# EAGLE board Qwiic Flex Glove Controller_Panel-v10 (EAGLE 7.7.0), part 1 of 4
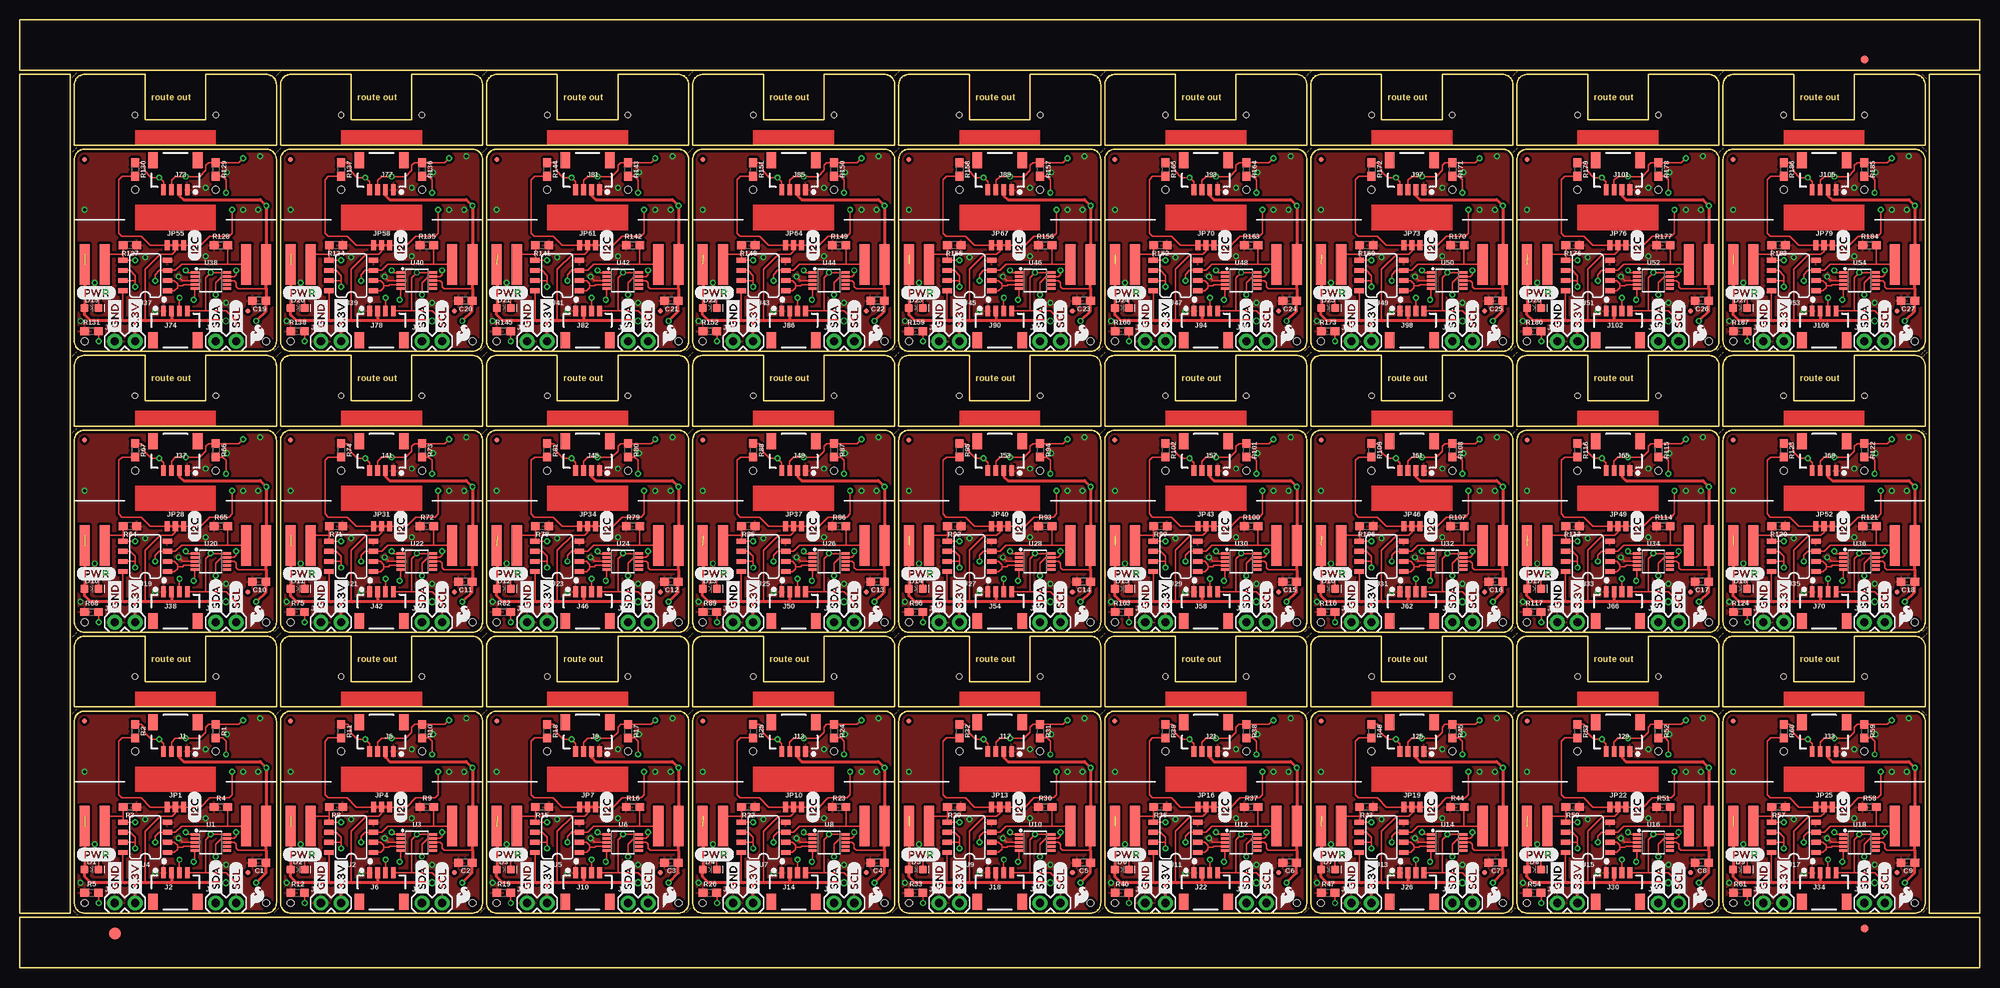
[diagram p0: board, top side]
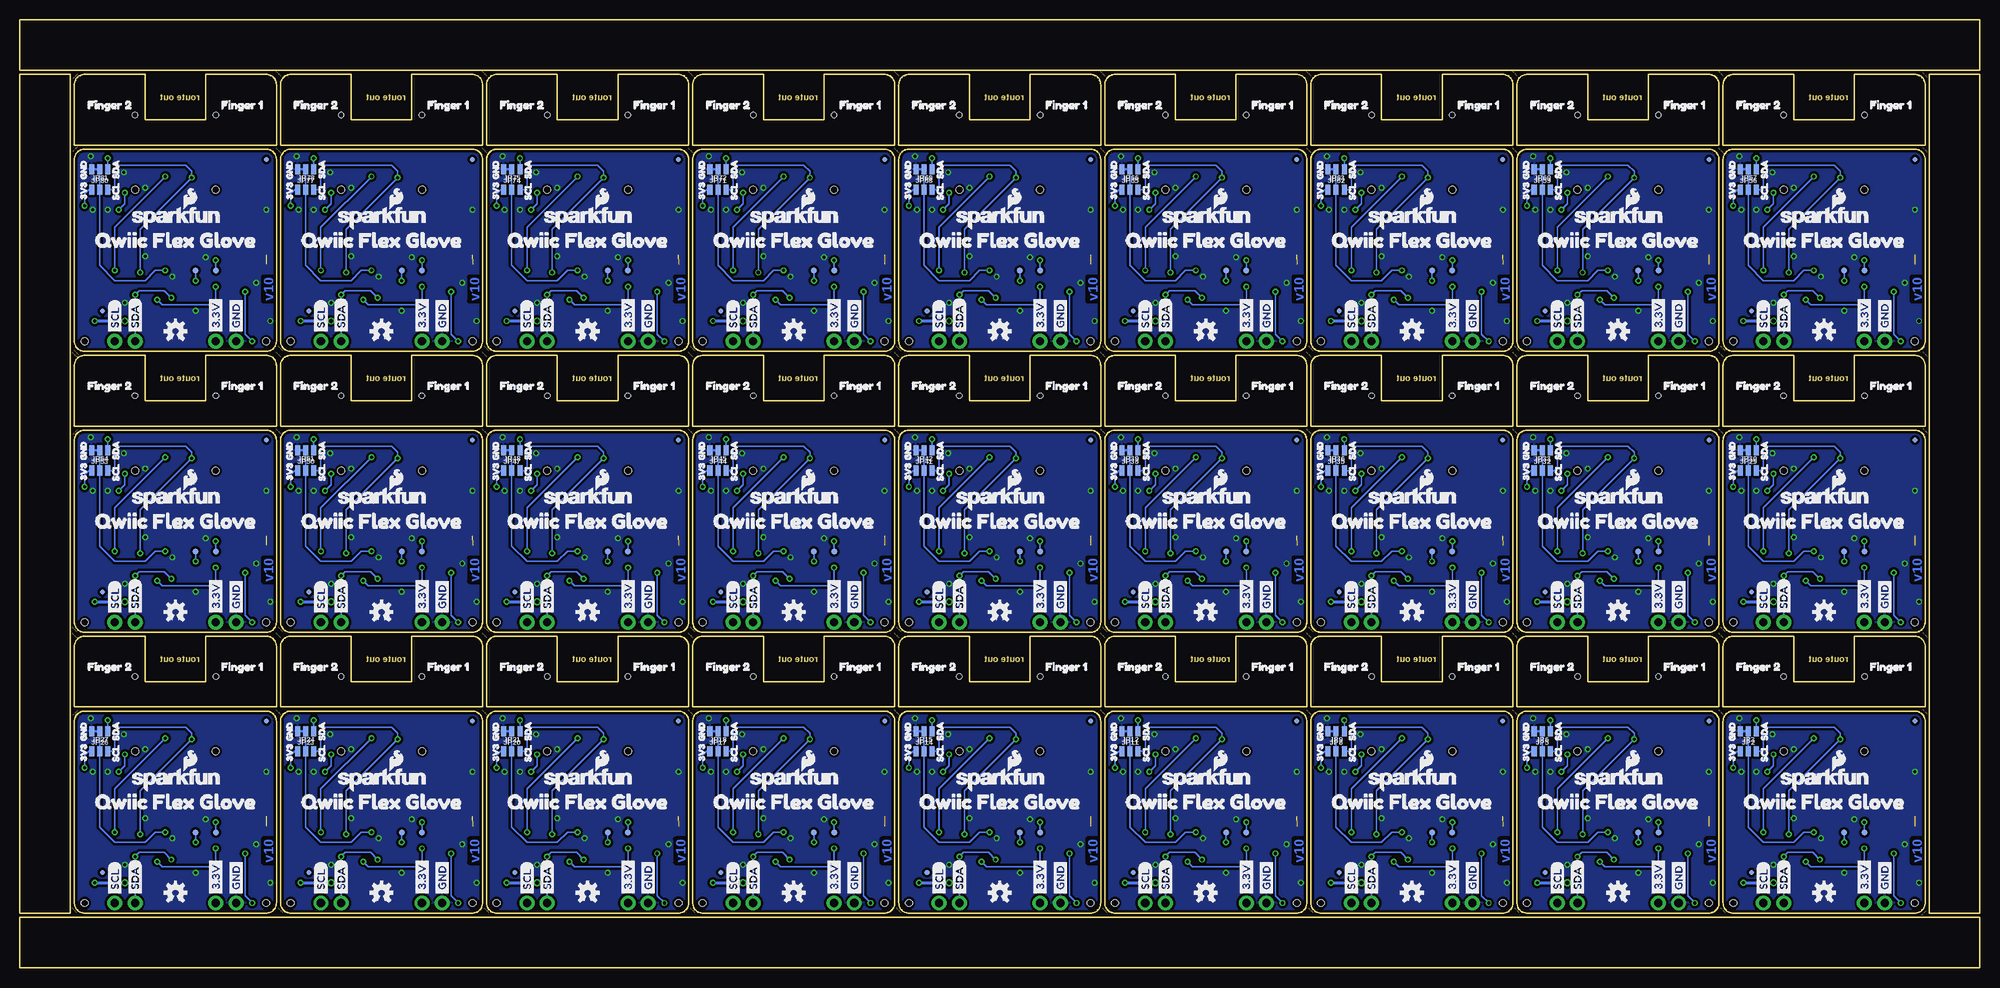
[diagram p1: board, bottom side, seen from below]

Size 246.38 x 119.13 mm. Coordinates in mm from the lower left corner, seen from the top.
Outline: 510 segments
Copper layers (1*16): Top 0.035mm / dielectric 1.5mm / Bottom 0.035mm
Design rules "SparkFun-2-layer-TIGHT": minimum track width 7mil, minimum drill 15mil, track to track 7mil, track to pad 7mil, pad to pad 7mil, via to via 7mil, smd to smd 7mil, copper to edge 7mil, drill to drill 7mil, minimum pad ring 7mil, minimum via ring 7mil, stop-mask expansion 4mil, vias tented up to drill 25mil, thermal gap 10mil
Holes 0.9 mm at 14.48,27.18 24.64,27.18 8.13,8.13 30.99,8.13 40.39,27.18 50.55,27.18 34.04,8.13 56.9,8.13 66.29,27.18 76.45,27.18 59.94,8.13 82.8,8.13 92.2,27.18 102.36,27.18 85.85,8.13 108.71,8.13 118.11,27.18 128.27,27.18 111.76,8.13 134.62,8.13 144.02,27.18 154.18,27.18 137.67,8.13 160.53,8.13 169.93,27.18 180.09,27.18 163.58,8.13 186.44,8.13 195.83,27.18 205.99,27.18 189.48,8.13 212.34,8.13 221.74,27.18 231.9,27.18 215.39,8.13 238.25,8.13 14.48,62.48 24.64,62.48 8.13,43.43 30.99,43.43 40.39,62.48 50.55,62.48 34.04,43.43 56.9,43.43 66.29,62.48 76.45,62.48 59.94,43.43 82.8,43.43 92.2,62.48 102.36,62.48 85.85,43.43 108.71,43.43 118.11,62.48 128.27,62.48 111.76,43.43 134.62,43.43 144.02,62.48 154.18,62.48 137.67,43.43 160.53,43.43 169.93,62.48 180.09,62.48 163.58,43.43 186.44,43.43 195.83,62.48 205.99,62.48 189.48,43.43 212.34,43.43 221.74,62.48 231.9,62.48 215.39,43.43 238.25,43.43 14.48,97.79 24.64,97.79 8.13,78.74 30.99,78.74 40.39,97.79 50.55,97.79 34.04,78.74 56.9,78.74 66.29,97.79 76.45,97.79 59.94,78.74 82.8,78.74 92.2,97.79 102.36,97.79 85.85,78.74 108.71,78.74 118.11,97.79 128.27,97.79 111.76,78.74 134.62,78.74 144.02,97.79 154.18,97.79 137.67,78.74 160.53,78.74 169.93,97.79 180.09,97.79 163.58,78.74 186.44,78.74 195.83,97.79 205.99,97.79 189.48,78.74 212.34,78.74 221.74,97.79 231.9,97.79 215.39,78.74 238.25,78.74
Holes 0.7 mm at 24.64,36.58 14.48,36.58 50.55,36.58 40.39,36.58 76.45,36.58 66.29,36.58 102.36,36.58 92.2,36.58 128.27,36.58 118.11,36.58 154.18,36.58 144.02,36.58 180.09,36.58 169.93,36.58 205.99,36.58 195.83,36.58 231.9,36.58 221.74,36.58 24.64,71.88 14.48,71.88 50.55,71.88 40.39,71.88 76.45,71.88 66.29,71.88 102.36,71.88 92.2,71.88 128.27,71.88 118.11,71.88 154.18,71.88 144.02,71.88 180.09,71.88 169.93,71.88 205.99,71.88 195.83,71.88 231.9,71.88 221.74,71.88 24.64,107.19 14.48,107.19 50.55,107.19 40.39,107.19 76.45,107.19 66.29,107.19 102.36,107.19 92.2,107.19 128.27,107.19 118.11,107.19 154.18,107.19 144.02,107.19 180.09,107.19 169.93,107.19 205.99,107.19 195.83,107.19 231.9,107.19 221.74,107.19

## Footprints (pad centres in the part's own frame; a part is rotated, then mirrored left to right if it is on the bottom)
0603 = smd 1.1 x 1: 1 -0.85,0; 2 0.85,0
LED-0603 = smd 1 x 1: A -0.877,0; C 0.877,0
FIDUCIAL-1.5X3 = smd 1.5 x 1.5: 1 0,0
FIDUCIAL-1X2 = smd 1 x 1: 1 0,0
FIDUCIAL-MICRO = smd 0.635 x 0.635: 1 0,0
1X04_1MM_RA = smd 0.6 x 1.35: 1 -1.5,0; 2 -0.5,0; 3 0.5,0; 4 1.5,0 | smd 1.2 x 2: NC1 2.8,-3.675; NC2 -2.8,-3.675
1X02 = drill 1.016 pad 1.88: 1 0,0; 2 2.54,0
SMT-JUMPER_3_2-NC_TRACE_NO-SILK = smd 0.635 x 1.27: 1 -1.016,0; 2 0,0; 3 1.016,0
SMT-JUMPER_3_1-NC_TRACE_NO-SILK = smd 0.635 x 1.27: 1 -1.016,0; 2 0,0; 3 1.016,0
SMT-JUMPER_3_0-NO_TRACE_NO-SILK = smd 0.635 x 1.27: 1 -1.016,0; 2 0,0; 3 1.016,0
FLEX_SENSOR = smd 1.27 x 5.08: P$1 -1.27,-1.27; P$2 1.27,-1.27
PAD.03X.03 = smd 0.762 x 0.762: P$1 0,0
MSOP10 = smd 0.3 x 1: 1 -1,-2.05; 2 -0.5,-2.05; 3 0,-2.05; 4 0.5,-2.05; 5 1,-2.05; 6 1,2.05; 7 0.5,2.05; 8 0,2.05; 9 -0.5,2.05; 10 -1,2.05
SO08 = smd 0.6 x 1.2: 1 -1.905,-2.8; 2 -0.635,-2.8; 3 0.635,-2.8; 4 1.905,-2.8; 5 1.905,2.8; 6 0.635,2.8; 7 -0.635,2.8; 8 -1.905,2.8

## Placement (x,y rotation side)
C1  0.1uF  [0603]  30.1,13.21 180 top
C2  0.1uF  [0603]  56.01,13.21 180 top
C3  0.1uF  [0603]  81.92,13.21 180 top
C4  0.1uF  [0603]  107.82,13.21 180 top
C5  0.1uF  [0603]  133.73,13.21 180 top
C6  0.1uF  [0603]  159.64,13.21 180 top
C7  0.1uF  [0603]  185.55,13.21 180 top
C8  0.1uF  [0603]  211.46,13.21 180 top
C9  0.1uF  [0603]  237.36,13.21 180 top
C10  0.1uF  [0603]  30.1,48.51 180 top
C11  0.1uF  [0603]  56.01,48.51 180 top
C12  0.1uF  [0603]  81.92,48.51 180 top
C13  0.1uF  [0603]  107.82,48.51 180 top
C14  0.1uF  [0603]  133.73,48.51 180 top
C15  0.1uF  [0603]  159.64,48.51 180 top
C16  0.1uF  [0603]  185.55,48.51 180 top
C17  0.1uF  [0603]  211.46,48.51 180 top
C18  0.1uF  [0603]  237.36,48.51 180 top
C19  0.1uF  [0603]  30.1,83.82 180 top
C20  0.1uF  [0603]  56.01,83.82 180 top
C21  0.1uF  [0603]  81.92,83.82 180 top
C22  0.1uF  [0603]  107.82,83.82 180 top
C23  0.1uF  [0603]  133.73,83.82 180 top
C24  0.1uF  [0603]  159.64,83.82 180 top
C25  0.1uF  [0603]  185.55,83.82 180 top
C26  0.1uF  [0603]  211.46,83.82 180 top
C27  0.1uF  [0603]  237.36,83.82 180 top
D1  RED  [LED-0603]  9.02,12.32 0 top
D2  RED  [LED-0603]  34.92,12.32 0 top
D3  RED  [LED-0603]  60.83,12.32 0 top
D4  RED  [LED-0603]  86.74,12.32 0 top
D5  RED  [LED-0603]  112.65,12.32 0 top
D6  RED  [LED-0603]  138.56,12.32 0 top
D7  RED  [LED-0603]  164.47,12.32 0 top
D8  RED  [LED-0603]  190.37,12.32 0 top
D9  RED  [LED-0603]  216.28,12.32 0 top
D10  RED  [LED-0603]  9.02,47.62 0 top
D11  RED  [LED-0603]  34.92,47.62 0 top
D12  RED  [LED-0603]  60.83,47.62 0 top
D13  RED  [LED-0603]  86.74,47.62 0 top
D14  RED  [LED-0603]  112.65,47.62 0 top
D15  RED  [LED-0603]  138.56,47.62 0 top
D16  RED  [LED-0603]  164.47,47.62 0 top
D17  RED  [LED-0603]  190.37,47.62 0 top
D18  RED  [LED-0603]  216.28,47.62 0 top
D19  RED  [LED-0603]  9.02,82.93 0 top
D20  RED  [LED-0603]  34.92,82.93 0 top
D21  RED  [LED-0603]  60.83,82.93 0 top
D22  RED  [LED-0603]  86.74,82.93 0 top
D23  RED  [LED-0603]  112.65,82.93 0 top
D24  RED  [LED-0603]  138.56,82.93 0 top
D25  RED  [LED-0603]  164.47,82.93 0 top
D26  RED  [LED-0603]  190.37,82.93 0 top
D27  RED  [LED-0603]  216.28,82.93 0 top
E$1  [FIDUCIAL-1.5X3]  11.94,4.32 0 top
E$5  [FIDUCIAL-1X2]  231.9,114.17 270 top
E$6  [FIDUCIAL-1X2]  231.9,4.95 90 top
FD1  FIDUCIALUFIDUCIAL  [FIDUCIAL-MICRO]  28.7,11.94 0 top
FD2  FIDUCIALUFIDUCIAL  [FIDUCIAL-MICRO]  28.7,11.94 0 bottom
FD3  FIDUCIALUFIDUCIAL  [FIDUCIAL-MICRO]  8.13,30.99 0 top
FD4  FIDUCIALUFIDUCIAL  [FIDUCIAL-MICRO]  8.13,30.99 0 bottom
FD5  FIDUCIALUFIDUCIAL  [FIDUCIAL-MICRO]  54.61,11.94 0 top
FD6  FIDUCIALUFIDUCIAL  [FIDUCIAL-MICRO]  54.61,11.94 0 bottom
FD7  FIDUCIALUFIDUCIAL  [FIDUCIAL-MICRO]  34.04,30.99 0 top
FD8  FIDUCIALUFIDUCIAL  [FIDUCIAL-MICRO]  34.04,30.99 0 bottom
FD9  FIDUCIALUFIDUCIAL  [FIDUCIAL-MICRO]  80.52,11.94 0 top
FD10  FIDUCIALUFIDUCIAL  [FIDUCIAL-MICRO]  80.52,11.94 0 bottom
FD11  FIDUCIALUFIDUCIAL  [FIDUCIAL-MICRO]  59.94,30.99 0 top
FD12  FIDUCIALUFIDUCIAL  [FIDUCIAL-MICRO]  59.94,30.99 0 bottom
FD13  FIDUCIALUFIDUCIAL  [FIDUCIAL-MICRO]  106.43,11.94 0 top
FD14  FIDUCIALUFIDUCIAL  [FIDUCIAL-MICRO]  106.43,11.94 0 bottom
FD15  FIDUCIALUFIDUCIAL  [FIDUCIAL-MICRO]  85.85,30.99 0 top
FD16  FIDUCIALUFIDUCIAL  [FIDUCIAL-MICRO]  85.85,30.99 0 bottom
FD17  FIDUCIALUFIDUCIAL  [FIDUCIAL-MICRO]  132.33,11.94 0 top
FD18  FIDUCIALUFIDUCIAL  [FIDUCIAL-MICRO]  132.33,11.94 0 bottom
FD19  FIDUCIALUFIDUCIAL  [FIDUCIAL-MICRO]  111.76,30.99 0 top
FD20  FIDUCIALUFIDUCIAL  [FIDUCIAL-MICRO]  111.76,30.99 0 bottom
FD21  FIDUCIALUFIDUCIAL  [FIDUCIAL-MICRO]  158.24,11.94 0 top
FD22  FIDUCIALUFIDUCIAL  [FIDUCIAL-MICRO]  158.24,11.94 0 bottom
FD23  FIDUCIALUFIDUCIAL  [FIDUCIAL-MICRO]  137.67,30.99 0 top
FD24  FIDUCIALUFIDUCIAL  [FIDUCIAL-MICRO]  137.67,30.99 0 bottom
FD25  FIDUCIALUFIDUCIAL  [FIDUCIAL-MICRO]  184.15,11.94 0 top
FD26  FIDUCIALUFIDUCIAL  [FIDUCIAL-MICRO]  184.15,11.94 0 bottom
FD27  FIDUCIALUFIDUCIAL  [FIDUCIAL-MICRO]  163.58,30.99 0 top
FD28  FIDUCIALUFIDUCIAL  [FIDUCIAL-MICRO]  163.58,30.99 0 bottom
FD29  FIDUCIALUFIDUCIAL  [FIDUCIAL-MICRO]  210.06,11.94 0 top
FD30  FIDUCIALUFIDUCIAL  [FIDUCIAL-MICRO]  210.06,11.94 0 bottom
FD31  FIDUCIALUFIDUCIAL  [FIDUCIAL-MICRO]  189.48,30.99 0 top
FD32  FIDUCIALUFIDUCIAL  [FIDUCIAL-MICRO]  189.48,30.99 0 bottom
FD33  FIDUCIALUFIDUCIAL  [FIDUCIAL-MICRO]  235.97,11.94 0 top
FD34  FIDUCIALUFIDUCIAL  [FIDUCIAL-MICRO]  235.97,11.94 0 bottom
FD35  FIDUCIALUFIDUCIAL  [FIDUCIAL-MICRO]  215.39,30.99 0 top
FD36  FIDUCIALUFIDUCIAL  [FIDUCIAL-MICRO]  215.39,30.99 0 bottom
FD37  FIDUCIALUFIDUCIAL  [FIDUCIAL-MICRO]  28.7,47.24 0 top
FD38  FIDUCIALUFIDUCIAL  [FIDUCIAL-MICRO]  28.7,47.24 0 bottom
FD39  FIDUCIALUFIDUCIAL  [FIDUCIAL-MICRO]  8.13,66.29 0 top
FD40  FIDUCIALUFIDUCIAL  [FIDUCIAL-MICRO]  8.13,66.29 0 bottom
FD41  FIDUCIALUFIDUCIAL  [FIDUCIAL-MICRO]  54.61,47.24 0 top
FD42  FIDUCIALUFIDUCIAL  [FIDUCIAL-MICRO]  54.61,47.24 0 bottom
FD43  FIDUCIALUFIDUCIAL  [FIDUCIAL-MICRO]  34.04,66.29 0 top
FD44  FIDUCIALUFIDUCIAL  [FIDUCIAL-MICRO]  34.04,66.29 0 bottom
FD45  FIDUCIALUFIDUCIAL  [FIDUCIAL-MICRO]  80.52,47.24 0 top
FD46  FIDUCIALUFIDUCIAL  [FIDUCIAL-MICRO]  80.52,47.24 0 bottom
FD47  FIDUCIALUFIDUCIAL  [FIDUCIAL-MICRO]  59.94,66.29 0 top
FD48  FIDUCIALUFIDUCIAL  [FIDUCIAL-MICRO]  59.94,66.29 0 bottom
FD49  FIDUCIALUFIDUCIAL  [FIDUCIAL-MICRO]  106.43,47.24 0 top
FD50  FIDUCIALUFIDUCIAL  [FIDUCIAL-MICRO]  106.43,47.24 0 bottom
FD51  FIDUCIALUFIDUCIAL  [FIDUCIAL-MICRO]  85.85,66.29 0 top
FD52  FIDUCIALUFIDUCIAL  [FIDUCIAL-MICRO]  85.85,66.29 0 bottom
FD53  FIDUCIALUFIDUCIAL  [FIDUCIAL-MICRO]  132.33,47.24 0 top
FD54  FIDUCIALUFIDUCIAL  [FIDUCIAL-MICRO]  132.33,47.24 0 bottom
FD55  FIDUCIALUFIDUCIAL  [FIDUCIAL-MICRO]  111.76,66.29 0 top
FD56  FIDUCIALUFIDUCIAL  [FIDUCIAL-MICRO]  111.76,66.29 0 bottom
FD57  FIDUCIALUFIDUCIAL  [FIDUCIAL-MICRO]  158.24,47.24 0 top
FD58  FIDUCIALUFIDUCIAL  [FIDUCIAL-MICRO]  158.24,47.24 0 bottom
FD59  FIDUCIALUFIDUCIAL  [FIDUCIAL-MICRO]  137.67,66.29 0 top
FD60  FIDUCIALUFIDUCIAL  [FIDUCIAL-MICRO]  137.67,66.29 0 bottom
FD61  FIDUCIALUFIDUCIAL  [FIDUCIAL-MICRO]  184.15,47.24 0 top
FD62  FIDUCIALUFIDUCIAL  [FIDUCIAL-MICRO]  184.15,47.24 0 bottom
FD63  FIDUCIALUFIDUCIAL  [FIDUCIAL-MICRO]  163.58,66.29 0 top
FD64  FIDUCIALUFIDUCIAL  [FIDUCIAL-MICRO]  163.58,66.29 0 bottom
FD65  FIDUCIALUFIDUCIAL  [FIDUCIAL-MICRO]  210.06,47.24 0 top
FD66  FIDUCIALUFIDUCIAL  [FIDUCIAL-MICRO]  210.06,47.24 0 bottom
FD67  FIDUCIALUFIDUCIAL  [FIDUCIAL-MICRO]  189.48,66.29 0 top
FD68  FIDUCIALUFIDUCIAL  [FIDUCIAL-MICRO]  189.48,66.29 0 bottom
FD69  FIDUCIALUFIDUCIAL  [FIDUCIAL-MICRO]  235.97,47.24 0 top
FD70  FIDUCIALUFIDUCIAL  [FIDUCIAL-MICRO]  235.97,47.24 0 bottom
FD71  FIDUCIALUFIDUCIAL  [FIDUCIAL-MICRO]  215.39,66.29 0 top
FD72  FIDUCIALUFIDUCIAL  [FIDUCIAL-MICRO]  215.39,66.29 0 bottom
FD73  FIDUCIALUFIDUCIAL  [FIDUCIAL-MICRO]  28.7,82.55 0 top
FD74  FIDUCIALUFIDUCIAL  [FIDUCIAL-MICRO]  28.7,82.55 0 bottom
FD75  FIDUCIALUFIDUCIAL  [FIDUCIAL-MICRO]  8.13,101.6 0 top
FD76  FIDUCIALUFIDUCIAL  [FIDUCIAL-MICRO]  8.13,101.6 0 bottom
FD77  FIDUCIALUFIDUCIAL  [FIDUCIAL-MICRO]  54.61,82.55 0 top
FD78  FIDUCIALUFIDUCIAL  [FIDUCIAL-MICRO]  54.61,82.55 0 bottom
FD79  FIDUCIALUFIDUCIAL  [FIDUCIAL-MICRO]  34.04,101.6 0 top
FD80  FIDUCIALUFIDUCIAL  [FIDUCIAL-MICRO]  34.04,101.6 0 bottom
FD81  FIDUCIALUFIDUCIAL  [FIDUCIAL-MICRO]  80.52,82.55 0 top
FD82  FIDUCIALUFIDUCIAL  [FIDUCIAL-MICRO]  80.52,82.55 0 bottom
FD83  FIDUCIALUFIDUCIAL  [FIDUCIAL-MICRO]  59.94,101.6 0 top
FD84  FIDUCIALUFIDUCIAL  [FIDUCIAL-MICRO]  59.94,101.6 0 bottom
FD85  FIDUCIALUFIDUCIAL  [FIDUCIAL-MICRO]  106.43,82.55 0 top
FD86  FIDUCIALUFIDUCIAL  [FIDUCIAL-MICRO]  106.43,82.55 0 bottom
FD87  FIDUCIALUFIDUCIAL  [FIDUCIAL-MICRO]  85.85,101.6 0 top
FD88  FIDUCIALUFIDUCIAL  [FIDUCIAL-MICRO]  85.85,101.6 0 bottom
FD89  FIDUCIALUFIDUCIAL  [FIDUCIAL-MICRO]  132.33,82.55 0 top
FD90  FIDUCIALUFIDUCIAL  [FIDUCIAL-MICRO]  132.33,82.55 0 bottom
FD91  FIDUCIALUFIDUCIAL  [FIDUCIAL-MICRO]  111.76,101.6 0 top
FD92  FIDUCIALUFIDUCIAL  [FIDUCIAL-MICRO]  111.76,101.6 0 bottom
FD93  FIDUCIALUFIDUCIAL  [FIDUCIAL-MICRO]  158.24,82.55 0 top
FD94  FIDUCIALUFIDUCIAL  [FIDUCIAL-MICRO]  158.24,82.55 0 bottom
FD95  FIDUCIALUFIDUCIAL  [FIDUCIAL-MICRO]  137.67,101.6 0 top
FD96  FIDUCIALUFIDUCIAL  [FIDUCIAL-MICRO]  137.67,101.6 0 bottom
FD97  FIDUCIALUFIDUCIAL  [FIDUCIAL-MICRO]  184.15,82.55 0 top
FD98  FIDUCIALUFIDUCIAL  [FIDUCIAL-MICRO]  184.15,82.55 0 bottom
FD99  FIDUCIALUFIDUCIAL  [FIDUCIAL-MICRO]  163.58,101.6 0 top
FD100  FIDUCIALUFIDUCIAL  [FIDUCIAL-MICRO]  163.58,101.6 0 bottom
FD101  FIDUCIALUFIDUCIAL  [FIDUCIAL-MICRO]  210.06,82.55 0 top
FD102  FIDUCIALUFIDUCIAL  [FIDUCIAL-MICRO]  210.06,82.55 0 bottom
FD103  FIDUCIALUFIDUCIAL  [FIDUCIAL-MICRO]  189.48,101.6 0 top
FD104  FIDUCIALUFIDUCIAL  [FIDUCIAL-MICRO]  189.48,101.6 0 bottom
FD105  FIDUCIALUFIDUCIAL  [FIDUCIAL-MICRO]  235.97,82.55 0 top
FD106  FIDUCIALUFIDUCIAL  [FIDUCIAL-MICRO]  235.97,82.55 0 bottom
FD107  FIDUCIALUFIDUCIAL  [FIDUCIAL-MICRO]  215.39,101.6 0 top
FD108  FIDUCIALUFIDUCIAL  [FIDUCIAL-MICRO]  215.39,101.6 0 bottom
J1  [1X04_1MM_RA]  19.56,27.18 180 top
J2  [1X04_1MM_RA]  19.56,11.94 0 top
J3  [1X02]  24.64,8.13 0 top
J4  [1X02]  11.94,8.13 0 top
J5  [1X04_1MM_RA]  45.47,27.18 180 top
J6  [1X04_1MM_RA]  45.47,11.94 0 top
J7  [1X02]  50.55,8.13 0 top
J8  [1X02]  37.85,8.13 0 top
J9  [1X04_1MM_RA]  71.37,27.18 180 top
J10  [1X04_1MM_RA]  71.37,11.94 0 top
J11  [1X02]  76.45,8.13 0 top
J12  [1X02]  63.75,8.13 0 top
J13  [1X04_1MM_RA]  97.28,27.18 180 top
J14  [1X04_1MM_RA]  97.28,11.94 0 top
J15  [1X02]  102.36,8.13 0 top
J16  [1X02]  89.66,8.13 0 top
J17  [1X04_1MM_RA]  123.19,27.18 180 top
J18  [1X04_1MM_RA]  123.19,11.94 0 top
J19  [1X02]  128.27,8.13 0 top
J20  [1X02]  115.57,8.13 0 top
J21  [1X04_1MM_RA]  149.1,27.18 180 top
J22  [1X04_1MM_RA]  149.1,11.94 0 top
J23  [1X02]  154.18,8.13 0 top
J24  [1X02]  141.48,8.13 0 top
J25  [1X04_1MM_RA]  175.01,27.18 180 top
J26  [1X04_1MM_RA]  175.01,11.94 0 top
J27  [1X02]  180.09,8.13 0 top
J28  [1X02]  167.39,8.13 0 top
J29  [1X04_1MM_RA]  200.91,27.18 180 top
J30  [1X04_1MM_RA]  200.91,11.94 0 top
J31  [1X02]  205.99,8.13 0 top
J32  [1X02]  193.29,8.13 0 top
J33  [1X04_1MM_RA]  226.82,27.18 180 top
J34  [1X04_1MM_RA]  226.82,11.94 0 top
J35  [1X02]  231.9,8.13 0 top
J36  [1X02]  219.2,8.13 0 top
J37  [1X04_1MM_RA]  19.56,62.48 180 top
J38  [1X04_1MM_RA]  19.56,47.24 0 top
J39  [1X02]  24.64,43.43 0 top
J40  [1X02]  11.94,43.43 0 top
J41  [1X04_1MM_RA]  45.47,62.48 180 top
J42  [1X04_1MM_RA]  45.47,47.24 0 top
J43  [1X02]  50.55,43.43 0 top
J44  [1X02]  37.85,43.43 0 top
J45  [1X04_1MM_RA]  71.37,62.48 180 top
J46  [1X04_1MM_RA]  71.37,47.24 0 top
J47  [1X02]  76.45,43.43 0 top
J48  [1X02]  63.75,43.43 0 top
J49  [1X04_1MM_RA]  97.28,62.48 180 top
J50  [1X04_1MM_RA]  97.28,47.24 0 top
J51  [1X02]  102.36,43.43 0 top
J52  [1X02]  89.66,43.43 0 top
J53  [1X04_1MM_RA]  123.19,62.48 180 top
J54  [1X04_1MM_RA]  123.19,47.24 0 top
J55  [1X02]  128.27,43.43 0 top
J56  [1X02]  115.57,43.43 0 top
J57  [1X04_1MM_RA]  149.1,62.48 180 top
J58  [1X04_1MM_RA]  149.1,47.24 0 top
J59  [1X02]  154.18,43.43 0 top
J60  [1X02]  141.48,43.43 0 top
J61  [1X04_1MM_RA]  175.01,62.48 180 top
J62  [1X04_1MM_RA]  175.01,47.24 0 top
J63  [1X02]  180.09,43.43 0 top
J64  [1X02]  167.39,43.43 0 top
J65  [1X04_1MM_RA]  200.91,62.48 180 top
J66  [1X04_1MM_RA]  200.91,47.24 0 top
J67  [1X02]  205.99,43.43 0 top
J68  [1X02]  193.29,43.43 0 top
J69  [1X04_1MM_RA]  226.82,62.48 180 top
J70  [1X04_1MM_RA]  226.82,47.24 0 top
J71  [1X02]  231.9,43.43 0 top
J72  [1X02]  219.2,43.43 0 top
J73  [1X04_1MM_RA]  19.56,97.79 180 top
J74  [1X04_1MM_RA]  19.56,82.55 0 top
J75  [1X02]  24.64,78.74 0 top
J76  [1X02]  11.94,78.74 0 top
J77  [1X04_1MM_RA]  45.47,97.79 180 top
J78  [1X04_1MM_RA]  45.47,82.55 0 top
J79  [1X02]  50.55,78.74 0 top
J80  [1X02]  37.85,78.74 0 top
J81  [1X04_1MM_RA]  71.37,97.79 180 top
J82  [1X04_1MM_RA]  71.37,82.55 0 top
J83  [1X02]  76.45,78.74 0 top
J84  [1X02]  63.75,78.74 0 top
J85  [1X04_1MM_RA]  97.28,97.79 180 top
J86  [1X04_1MM_RA]  97.28,82.55 0 top
J87  [1X02]  102.36,78.74 0 top
J88  [1X02]  89.66,78.74 0 top
J89  [1X04_1MM_RA]  123.19,97.79 180 top
J90  [1X04_1MM_RA]  123.19,82.55 0 top
J91  [1X02]  128.27,78.74 0 top
J92  [1X02]  115.57,78.74 0 top
J93  [1X04_1MM_RA]  149.1,97.79 180 top
J94  [1X04_1MM_RA]  149.1,82.55 0 top
J95  [1X02]  154.18,78.74 0 top
J96  [1X02]  141.48,78.74 0 top
J97  [1X04_1MM_RA]  175.01,97.79 180 top
J98  [1X04_1MM_RA]  175.01,82.55 0 top
J99  [1X02]  180.09,78.74 0 top
J100  [1X02]  167.39,78.74 0 top
J101  [1X04_1MM_RA]  200.91,97.79 180 top
J102  [1X04_1MM_RA]  200.91,82.55 0 top
J103  [1X02]  205.99,78.74 0 top
J104  [1X02]  193.29,78.74 0 top
J105  [1X04_1MM_RA]  226.82,97.79 180 top
J106  [1X04_1MM_RA]  226.82,82.55 0 top
J107  [1X02]  231.9,78.74 0 top
J108  [1X02]  219.2,78.74 0 top
JP1  JUMPER-SMT_3_2-NC_TRACE_NO-SILK  [SMT-JUMPER_3_2-NC_TRACE_NO-SILK]  19.56,20.19 0 top
JP2  JUMPER-SMT_3_1-NC_TRACE_NO-SILK  [SMT-JUMPER_3_1-NC_TRACE_NO-SILK]  29.08,29.72 180 bottom
JP3  JUMPER-SMT_3_NO_NO_SILK  [SMT-JUMPER_3_0-NO_TRACE_NO-SILK]  29.08,27.18 0 bottom
JP4  JUMPER-SMT_3_2-NC_TRACE_NO-SILK  [SMT-JUMPER_3_2-NC_TRACE_NO-SILK]  45.47,20.19 0 top
JP5  JUMPER-SMT_3_1-NC_TRACE_NO-SILK  [SMT-JUMPER_3_1-NC_TRACE_NO-SILK]  54.99,29.72 180 bottom
JP6  JUMPER-SMT_3_NO_NO_SILK  [SMT-JUMPER_3_0-NO_TRACE_NO-SILK]  54.99,27.18 0 bottom
JP7  JUMPER-SMT_3_2-NC_TRACE_NO-SILK  [SMT-JUMPER_3_2-NC_TRACE_NO-SILK]  71.37,20.19 0 top
JP8  JUMPER-SMT_3_1-NC_TRACE_NO-SILK  [SMT-JUMPER_3_1-NC_TRACE_NO-SILK]  80.9,29.72 180 bottom
JP9  JUMPER-SMT_3_NO_NO_SILK  [SMT-JUMPER_3_0-NO_TRACE_NO-SILK]  80.9,27.18 0 bottom
JP10  JUMPER-SMT_3_2-NC_TRACE_NO-SILK  [SMT-JUMPER_3_2-NC_TRACE_NO-SILK]  97.28,20.19 0 top
JP11  JUMPER-SMT_3_1-NC_TRACE_NO-SILK  [SMT-JUMPER_3_1-NC_TRACE_NO-SILK]  106.81,29.72 180 bottom
JP12  JUMPER-SMT_3_NO_NO_SILK  [SMT-JUMPER_3_0-NO_TRACE_NO-SILK]  106.81,27.18 0 bottom
JP13  JUMPER-SMT_3_2-NC_TRACE_NO-SILK  [SMT-JUMPER_3_2-NC_TRACE_NO-SILK]  123.19,20.19 0 top
JP14  JUMPER-SMT_3_1-NC_TRACE_NO-SILK  [SMT-JUMPER_3_1-NC_TRACE_NO-SILK]  132.72,29.72 180 bottom
JP15  JUMPER-SMT_3_NO_NO_SILK  [SMT-JUMPER_3_0-NO_TRACE_NO-SILK]  132.72,27.18 0 bottom
JP16  JUMPER-SMT_3_2-NC_TRACE_NO-SILK  [SMT-JUMPER_3_2-NC_TRACE_NO-SILK]  149.1,20.19 0 top
JP17  JUMPER-SMT_3_1-NC_TRACE_NO-SILK  [SMT-JUMPER_3_1-NC_TRACE_NO-SILK]  158.62,29.72 180 bottom
JP18  JUMPER-SMT_3_NO_NO_SILK  [SMT-JUMPER_3_0-NO_TRACE_NO-SILK]  158.62,27.18 0 bottom
JP19  JUMPER-SMT_3_2-NC_TRACE_NO-SILK  [SMT-JUMPER_3_2-NC_TRACE_NO-SILK]  175.01,20.19 0 top
JP20  JUMPER-SMT_3_1-NC_TRACE_NO-SILK  [SMT-JUMPER_3_1-NC_TRACE_NO-SILK]  184.53,29.72 180 bottom
JP21  JUMPER-SMT_3_NO_NO_SILK  [SMT-JUMPER_3_0-NO_TRACE_NO-SILK]  184.53,27.18 0 bottom
JP22  JUMPER-SMT_3_2-NC_TRACE_NO-SILK  [SMT-JUMPER_3_2-NC_TRACE_NO-SILK]  200.91,20.19 0 top
JP23  JUMPER-SMT_3_1-NC_TRACE_NO-SILK  [SMT-JUMPER_3_1-NC_TRACE_NO-SILK]  210.44,29.72 180 bottom
JP24  JUMPER-SMT_3_NO_NO_SILK  [SMT-JUMPER_3_0-NO_TRACE_NO-SILK]  210.44,27.18 0 bottom
JP25  JUMPER-SMT_3_2-NC_TRACE_NO-SILK  [SMT-JUMPER_3_2-NC_TRACE_NO-SILK]  226.82,20.19 0 top
JP26  JUMPER-SMT_3_1-NC_TRACE_NO-SILK  [SMT-JUMPER_3_1-NC_TRACE_NO-SILK]  236.35,29.72 180 bottom
JP27  JUMPER-SMT_3_NO_NO_SILK  [SMT-JUMPER_3_0-NO_TRACE_NO-SILK]  236.35,27.18 0 bottom
JP28  JUMPER-SMT_3_2-NC_TRACE_NO-SILK  [SMT-JUMPER_3_2-NC_TRACE_NO-SILK]  19.56,55.5 0 top
JP29  JUMPER-SMT_3_1-NC_TRACE_NO-SILK  [SMT-JUMPER_3_1-NC_TRACE_NO-SILK]  29.08,65.02 180 bottom
JP30  JUMPER-SMT_3_NO_NO_SILK  [SMT-JUMPER_3_0-NO_TRACE_NO-SILK]  29.08,62.48 0 bottom
JP31  JUMPER-SMT_3_2-NC_TRACE_NO-SILK  [SMT-JUMPER_3_2-NC_TRACE_NO-SILK]  45.47,55.5 0 top
JP32  JUMPER-SMT_3_1-NC_TRACE_NO-SILK  [SMT-JUMPER_3_1-NC_TRACE_NO-SILK]  54.99,65.02 180 bottom
JP33  JUMPER-SMT_3_NO_NO_SILK  [SMT-JUMPER_3_0-NO_TRACE_NO-SILK]  54.99,62.48 0 bottom
JP34  JUMPER-SMT_3_2-NC_TRACE_NO-SILK  [SMT-JUMPER_3_2-NC_TRACE_NO-SILK]  71.37,55.5 0 top
JP35  JUMPER-SMT_3_1-NC_TRACE_NO-SILK  [SMT-JUMPER_3_1-NC_TRACE_NO-SILK]  80.9,65.02 180 bottom
JP36  JUMPER-SMT_3_NO_NO_SILK  [SMT-JUMPER_3_0-NO_TRACE_NO-SILK]  80.9,62.48 0 bottom
JP37  JUMPER-SMT_3_2-NC_TRACE_NO-SILK  [SMT-JUMPER_3_2-NC_TRACE_NO-SILK]  97.28,55.5 0 top
JP38  JUMPER-SMT_3_1-NC_TRACE_NO-SILK  [SMT-JUMPER_3_1-NC_TRACE_NO-SILK]  106.81,65.02 180 bottom
JP39  JUMPER-SMT_3_NO_NO_SILK  [SMT-JUMPER_3_0-NO_TRACE_NO-SILK]  106.81,62.48 0 bottom
JP40  JUMPER-SMT_3_2-NC_TRACE_NO-SILK  [SMT-JUMPER_3_2-NC_TRACE_NO-SILK]  123.19,55.5 0 top
JP41  JUMPER-SMT_3_1-NC_TRACE_NO-SILK  [SMT-JUMPER_3_1-NC_TRACE_NO-SILK]  132.72,65.02 180 bottom
JP42  JUMPER-SMT_3_NO_NO_SILK  [SMT-JUMPER_3_0-NO_TRACE_NO-SILK]  132.72,62.48 0 bottom
JP43  JUMPER-SMT_3_2-NC_TRACE_NO-SILK  [SMT-JUMPER_3_2-NC_TRACE_NO-SILK]  149.1,55.5 0 top
JP44  JUMPER-SMT_3_1-NC_TRACE_NO-SILK  [SMT-JUMPER_3_1-NC_TRACE_NO-SILK]  158.62,65.02 180 bottom
JP45  JUMPER-SMT_3_NO_NO_SILK  [SMT-JUMPER_3_0-NO_TRACE_NO-SILK]  158.62,62.48 0 bottom
JP46  JUMPER-SMT_3_2-NC_TRACE_NO-SILK  [SMT-JUMPER_3_2-NC_TRACE_NO-SILK]  175.01,55.5 0 top
JP47  JUMPER-SMT_3_1-NC_TRACE_NO-SILK  [SMT-JUMPER_3_1-NC_TRACE_NO-SILK]  184.53,65.02 180 bottom
JP48  JUMPER-SMT_3_NO_NO_SILK  [SMT-JUMPER_3_0-NO_TRACE_NO-SILK]  184.53,62.48 0 bottom
JP49  JUMPER-SMT_3_2-NC_TRACE_NO-SILK  [SMT-JUMPER_3_2-NC_TRACE_NO-SILK]  200.91,55.5 0 top
JP50  JUMPER-SMT_3_1-NC_TRACE_NO-SILK  [SMT-JUMPER_3_1-NC_TRACE_NO-SILK]  210.44,65.02 180 bottom
JP51  JUMPER-SMT_3_NO_NO_SILK  [SMT-JUMPER_3_0-NO_TRACE_NO-SILK]  210.44,62.48 0 bottom
JP52  JUMPER-SMT_3_2-NC_TRACE_NO-SILK  [SMT-JUMPER_3_2-NC_TRACE_NO-SILK]  226.82,55.5 0 top
JP53  JUMPER-SMT_3_1-NC_TRACE_NO-SILK  [SMT-JUMPER_3_1-NC_TRACE_NO-SILK]  236.35,65.02 180 bottom
JP54  JUMPER-SMT_3_NO_NO_SILK  [SMT-JUMPER_3_0-NO_TRACE_NO-SILK]  236.35,62.48 0 bottom
JP55  JUMPER-SMT_3_2-NC_TRACE_NO-SILK  [SMT-JUMPER_3_2-NC_TRACE_NO-SILK]  19.56,90.81 0 top
JP56  JUMPER-SMT_3_1-NC_TRACE_NO-SILK  [SMT-JUMPER_3_1-NC_TRACE_NO-SILK]  29.08,100.33 180 bottom
JP57  JUMPER-SMT_3_NO_NO_SILK  [SMT-JUMPER_3_0-NO_TRACE_NO-SILK]  29.08,97.79 0 bottom
JP58  JUMPER-SMT_3_2-NC_TRACE_NO-SILK  [SMT-JUMPER_3_2-NC_TRACE_NO-SILK]  45.47,90.81 0 top
JP59  JUMPER-SMT_3_1-NC_TRACE_NO-SILK  [SMT-JUMPER_3_1-NC_TRACE_NO-SILK]  54.99,100.33 180 bottom
JP60  JUMPER-SMT_3_NO_NO_SILK  [SMT-JUMPER_3_0-NO_TRACE_NO-SILK]  54.99,97.79 0 bottom
JP61  JUMPER-SMT_3_2-NC_TRACE_NO-SILK  [SMT-JUMPER_3_2-NC_TRACE_NO-SILK]  71.37,90.81 0 top
JP62  JUMPER-SMT_3_1-NC_TRACE_NO-SILK  [SMT-JUMPER_3_1-NC_TRACE_NO-SILK]  80.9,100.33 180 bottom
JP63  JUMPER-SMT_3_NO_NO_SILK  [SMT-JUMPER_3_0-NO_TRACE_NO-SILK]  80.9,97.79 0 bottom
JP64  JUMPER-SMT_3_2-NC_TRACE_NO-SILK  [SMT-JUMPER_3_2-NC_TRACE_NO-SILK]  97.28,90.81 0 top
JP65  JUMPER-SMT_3_1-NC_TRACE_NO-SILK  [SMT-JUMPER_3_1-NC_TRACE_NO-SILK]  106.81,100.33 180 bottom
JP66  JUMPER-SMT_3_NO_NO_SILK  [SMT-JUMPER_3_0-NO_TRACE_NO-SILK]  106.81,97.79 0 bottom
JP67  JUMPER-SMT_3_2-NC_TRACE_NO-SILK  [SMT-JUMPER_3_2-NC_TRACE_NO-SILK]  123.19,90.81 0 top
JP68  JUMPER-SMT_3_1-NC_TRACE_NO-SILK  [SMT-JUMPER_3_1-NC_TRACE_NO-SILK]  132.72,100.33 180 bottom
JP69  JUMPER-SMT_3_NO_NO_SILK  [SMT-JUMPER_3_0-NO_TRACE_NO-SILK]  132.72,97.79 0 bottom
JP70  JUMPER-SMT_3_2-NC_TRACE_NO-SILK  [SMT-JUMPER_3_2-NC_TRACE_NO-SILK]  149.1,90.81 0 top
JP71  JUMPER-SMT_3_1-NC_TRACE_NO-SILK  [SMT-JUMPER_3_1-NC_TRACE_NO-SILK]  158.62,100.33 180 bottom
JP72  JUMPER-SMT_3_NO_NO_SILK  [SMT-JUMPER_3_0-NO_TRACE_NO-SILK]  158.62,97.79 0 bottom
JP73  JUMPER-SMT_3_2-NC_TRACE_NO-SILK  [SMT-JUMPER_3_2-NC_TRACE_NO-SILK]  175.01,90.81 0 top
JP74  JUMPER-SMT_3_1-NC_TRACE_NO-SILK  [SMT-JUMPER_3_1-NC_TRACE_NO-SILK]  184.53,100.33 180 bottom
JP75  JUMPER-SMT_3_NO_NO_SILK  [SMT-JUMPER_3_0-NO_TRACE_NO-SILK]  184.53,97.79 0 bottom
JP76  JUMPER-SMT_3_2-NC_TRACE_NO-SILK  [SMT-JUMPER_3_2-NC_TRACE_NO-SILK]  200.91,90.81 0 top
JP77  JUMPER-SMT_3_1-NC_TRACE_NO-SILK  [SMT-JUMPER_3_1-NC_TRACE_NO-SILK]  210.44,100.33 180 bottom
JP78  JUMPER-SMT_3_NO_NO_SILK  [SMT-JUMPER_3_0-NO_TRACE_NO-SILK]  210.44,97.79 0 bottom
JP79  JUMPER-SMT_3_2-NC_TRACE_NO-SILK  [SMT-JUMPER_3_2-NC_TRACE_NO-SILK]  226.82,90.81 0 top
JP80  JUMPER-SMT_3_1-NC_TRACE_NO-SILK  [SMT-JUMPER_3_1-NC_TRACE_NO-SILK]  236.35,100.33 180 bottom
JP81  JUMPER-SMT_3_NO_NO_SILK  [SMT-JUMPER_3_0-NO_TRACE_NO-SILK]  236.35,97.79 0 bottom
LOGO1  SFE_LOGO_NAME_FLAME.1_INCH  [SFE_LOGO_NAME_FLAME_.1]  25.4,22.1 0 bottom
LOGO2  OSHW-LOGOS  [OSHW-LOGO-S]  19.56,9.4 0 bottom
LOGO3  SFE_LOGO_FLAME.1_INCH  [SFE_LOGO_FLAME_.1]  28.7,7.24 0 top
LOGO4  SFE_LOGO_NAME_FLAME.1_INCH  [SFE_LOGO_NAME_FLAME_.1]  51.31,22.1 0 bottom
LOGO5  OSHW-LOGOS  [OSHW-LOGO-S]  45.47,9.4 0 bottom
LOGO6  SFE_LOGO_FLAME.1_INCH  [SFE_LOGO_FLAME_.1]  54.61,7.24 0 top
LOGO7  SFE_LOGO_NAME_FLAME.1_INCH  [SFE_LOGO_NAME_FLAME_.1]  77.22,22.1 0 bottom
LOGO8  OSHW-LOGOS  [OSHW-LOGO-S]  71.37,9.4 0 bottom
LOGO9  SFE_LOGO_FLAME.1_INCH  [SFE_LOGO_FLAME_.1]  80.52,7.24 0 top
LOGO10  SFE_LOGO_NAME_FLAME.1_INCH  [SFE_LOGO_NAME_FLAME_.1]  103.12,22.1 0 bottom
LOGO11  OSHW-LOGOS  [OSHW-LOGO-S]  97.28,9.4 0 bottom
LOGO12  SFE_LOGO_FLAME.1_INCH  [SFE_LOGO_FLAME_.1]  106.43,7.24 0 top
LOGO13  SFE_LOGO_NAME_FLAME.1_INCH  [SFE_LOGO_NAME_FLAME_.1]  129.03,22.1 0 bottom
LOGO14  OSHW-LOGOS  [OSHW-LOGO-S]  123.19,9.4 0 bottom
LOGO15  SFE_LOGO_FLAME.1_INCH  [SFE_LOGO_FLAME_.1]  132.33,7.24 0 top
LOGO16  SFE_LOGO_NAME_FLAME.1_INCH  [SFE_LOGO_NAME_FLAME_.1]  154.94,22.1 0 bottom
LOGO17  OSHW-LOGOS  [OSHW-LOGO-S]  149.1,9.4 0 bottom
LOGO18  SFE_LOGO_FLAME.1_INCH  [SFE_LOGO_FLAME_.1]  158.24,7.24 0 top
LOGO19  SFE_LOGO_NAME_FLAME.1_INCH  [SFE_LOGO_NAME_FLAME_.1]  180.85,22.1 0 bottom
LOGO20  OSHW-LOGOS  [OSHW-LOGO-S]  175.01,9.4 0 bottom
LOGO21  SFE_LOGO_FLAME.1_INCH  [SFE_LOGO_FLAME_.1]  184.15,7.24 0 top
LOGO22  SFE_LOGO_NAME_FLAME.1_INCH  [SFE_LOGO_NAME_FLAME_.1]  206.76,22.1 0 bottom
LOGO23  OSHW-LOGOS  [OSHW-LOGO-S]  200.91,9.4 0 bottom
LOGO24  SFE_LOGO_FLAME.1_INCH  [SFE_LOGO_FLAME_.1]  210.06,7.24 0 top
LOGO25  SFE_LOGO_NAME_FLAME.1_INCH  [SFE_LOGO_NAME_FLAME_.1]  232.66,22.1 0 bottom
LOGO26  OSHW-LOGOS  [OSHW-LOGO-S]  226.82,9.4 0 bottom
LOGO27  SFE_LOGO_FLAME.1_INCH  [SFE_LOGO_FLAME_.1]  235.97,7.24 0 top
LOGO28  SFE_LOGO_NAME_FLAME.1_INCH  [SFE_LOGO_NAME_FLAME_.1]  25.4,57.4 0 bottom
LOGO29  OSHW-LOGOS  [OSHW-LOGO-S]  19.56,44.7 0 bottom
LOGO30  SFE_LOGO_FLAME.1_INCH  [SFE_LOGO_FLAME_.1]  28.7,42.55 0 top
LOGO31  SFE_LOGO_NAME_FLAME.1_INCH  [SFE_LOGO_NAME_FLAME_.1]  51.31,57.4 0 bottom
LOGO32  OSHW-LOGOS  [OSHW-LOGO-S]  45.47,44.7 0 bottom
LOGO33  SFE_LOGO_FLAME.1_INCH  [SFE_LOGO_FLAME_.1]  54.61,42.55 0 top
LOGO34  SFE_LOGO_NAME_FLAME.1_INCH  [SFE_LOGO_NAME_FLAME_.1]  77.22,57.4 0 bottom
LOGO35  OSHW-LOGOS  [OSHW-LOGO-S]  71.37,44.7 0 bottom
LOGO36  SFE_LOGO_FLAME.1_INCH  [SFE_LOGO_FLAME_.1]  80.52,42.55 0 top
LOGO37  SFE_LOGO_NAME_FLAME.1_INCH  [SFE_LOGO_NAME_FLAME_.1]  103.12,57.4 0 bottom
LOGO38  OSHW-LOGOS  [OSHW-LOGO-S]  97.28,44.7 0 bottom
LOGO39  SFE_LOGO_FLAME.1_INCH  [SFE_LOGO_FLAME_.1]  106.43,42.55 0 top
LOGO40  SFE_LOGO_NAME_FLAME.1_INCH  [SFE_LOGO_NAME_FLAME_.1]  129.03,57.4 0 bottom
LOGO41  OSHW-LOGOS  [OSHW-LOGO-S]  123.19,44.7 0 bottom
LOGO42  SFE_LOGO_FLAME.1_INCH  [SFE_LOGO_FLAME_.1]  132.33,42.55 0 top
LOGO43  SFE_LOGO_NAME_FLAME.1_INCH  [SFE_LOGO_NAME_FLAME_.1]  154.94,57.4 0 bottom
LOGO44  OSHW-LOGOS  [OSHW-LOGO-S]  149.1,44.7 0 bottom
LOGO45  SFE_LOGO_FLAME.1_INCH  [SFE_LOGO_FLAME_.1]  158.24,42.55 0 top
LOGO46  SFE_LOGO_NAME_FLAME.1_INCH  [SFE_LOGO_NAME_FLAME_.1]  180.85,57.4 0 bottom
LOGO47  OSHW-LOGOS  [OSHW-LOGO-S]  175.01,44.7 0 bottom
LOGO48  SFE_LOGO_FLAME.1_INCH  [SFE_LOGO_FLAME_.1]  184.15,42.55 0 top
LOGO49  SFE_LOGO_NAME_FLAME.1_INCH  [SFE_LOGO_NAME_FLAME_.1]  206.76,57.4 0 bottom
LOGO50  OSHW-LOGOS  [OSHW-LOGO-S]  200.91,44.7 0 bottom
LOGO51  SFE_LOGO_FLAME.1_INCH  [SFE_LOGO_FLAME_.1]  210.06,42.55 0 top
LOGO52  SFE_LOGO_NAME_FLAME.1_INCH  [SFE_LOGO_NAME_FLAME_.1]  232.66,57.4 0 bottom
LOGO53  OSHW-LOGOS  [OSHW-LOGO-S]  226.82,44.7 0 bottom
LOGO54  SFE_LOGO_FLAME.1_INCH  [SFE_LOGO_FLAME_.1]  235.97,42.55 0 top
LOGO55  SFE_LOGO_NAME_FLAME.1_INCH  [SFE_LOGO_NAME_FLAME_.1]  25.4,92.71 0 bottom
LOGO56  OSHW-LOGOS  [OSHW-LOGO-S]  19.56,80.01 0 bottom
LOGO57  SFE_LOGO_FLAME.1_INCH  [SFE_LOGO_FLAME_.1]  28.7,77.85 0 top
LOGO58  SFE_LOGO_NAME_FLAME.1_INCH  [SFE_LOGO_NAME_FLAME_.1]  51.31,92.71 0 bottom
LOGO59  OSHW-LOGOS  [OSHW-LOGO-S]  45.47,80.01 0 bottom
LOGO60  SFE_LOGO_FLAME.1_INCH  [SFE_LOGO_FLAME_.1]  54.61,77.85 0 top
LOGO61  SFE_LOGO_NAME_FLAME.1_INCH  [SFE_LOGO_NAME_FLAME_.1]  77.22,92.71 0 bottom
LOGO62  OSHW-LOGOS  [OSHW-LOGO-S]  71.37,80.01 0 bottom
LOGO63  SFE_LOGO_FLAME.1_INCH  [SFE_LOGO_FLAME_.1]  80.52,77.85 0 top
LOGO64  SFE_LOGO_NAME_FLAME.1_INCH  [SFE_LOGO_NAME_FLAME_.1]  103.12,92.71 0 bottom
LOGO65  OSHW-LOGOS  [OSHW-LOGO-S]  97.28,80.01 0 bottom
LOGO66  SFE_LOGO_FLAME.1_INCH  [SFE_LOGO_FLAME_.1]  106.43,77.85 0 top
LOGO67  SFE_LOGO_NAME_FLAME.1_INCH  [SFE_LOGO_NAME_FLAME_.1]  129.03,92.71 0 bottom
LOGO68  OSHW-LOGOS  [OSHW-LOGO-S]  123.19,80.01 0 bottom
LOGO69  SFE_LOGO_FLAME.1_INCH  [SFE_LOGO_FLAME_.1]  132.33,77.85 0 top
LOGO70  SFE_LOGO_NAME_FLAME.1_INCH  [SFE_LOGO_NAME_FLAME_.1]  154.94,92.71 0 bottom
LOGO71  OSHW-LOGOS  [OSHW-LOGO-S]  149.1,80.01 0 bottom
LOGO72  SFE_LOGO_FLAME.1_INCH  [SFE_LOGO_FLAME_.1]  158.24,77.85 0 top
LOGO73  SFE_LOGO_NAME_FLAME.1_INCH  [SFE_LOGO_NAME_FLAME_.1]  180.85,92.71 0 bottom
LOGO74  OSHW-LOGOS  [OSHW-LOGO-S]  175.01,80.01 0 bottom
LOGO75  SFE_LOGO_FLAME.1_INCH  [SFE_LOGO_FLAME_.1]  184.15,77.85 0 top
LOGO76  SFE_LOGO_NAME_FLAME.1_INCH  [SFE_LOGO_NAME_FLAME_.1]  206.76,92.71 0 bottom
LOGO77  OSHW-LOGOS  [OSHW-LOGO-S]  200.91,80.01 0 bottom
LOGO78  SFE_LOGO_FLAME.1_INCH  [SFE_LOGO_FLAME_.1]  210.06,77.85 0 top
LOGO79  SFE_LOGO_NAME_FLAME.1_INCH  [SFE_LOGO_NAME_FLAME_.1]  232.66,92.71 0 bottom
LOGO80  OSHW-LOGOS  [OSHW-LOGO-S]  226.82,80.01 0 bottom
LOGO81  SFE_LOGO_FLAME.1_INCH  [SFE_LOGO_FLAME_.1]  235.97,77.85 0 top
R1  4.7k  [0603]  24.64,29.72 270 top
R2  4.7k  [0603]  14.48,29.72 270 top
R3  100k  [0603]  13.84,20.19 180 top
R4  100k  [0603]  25.27,20.19 0 top
R5  1k  [0603]  9.02,9.4 0 top
R6  FLEX_SENSOR-4.5"  [FLEX_SENSOR]  29.72,19.05 0 top
R7  FLEX_SENSOR-4.5"  [FLEX_SENSOR]  9.4,19.05 0 top
R8  100k  [0603]  39.75,20.19 180 top
R9  100k  [0603]  51.18,20.19 0 top
R10  4.7k  [0603]  50.55,29.72 270 top
R11  4.7k  [0603]  40.39,29.72 270 top
R12  1k  [0603]  34.92,9.4 0 top
R13  FLEX_SENSOR-4.5"  [FLEX_SENSOR]  55.63,19.05 0 top
R14  FLEX_SENSOR-4.5"  [FLEX_SENSOR]  35.31,19.05 0 top
R15  100k  [0603]  65.66,20.19 180 top
R16  100k  [0603]  77.09,20.19 0 top
R17  4.7k  [0603]  76.45,29.72 270 top
R18  4.7k  [0603]  66.29,29.72 270 top
R19  1k  [0603]  60.83,9.4 0 top
R20  FLEX_SENSOR-4.5"  [FLEX_SENSOR]  81.53,19.05 0 top
R21  FLEX_SENSOR-4.5"  [FLEX_SENSOR]  61.21,19.05 0 top
R22  100k  [0603]  91.57,20.19 180 top
R23  100k  [0603]  103,20.19 0 top
R24  4.7k  [0603]  102.36,29.72 270 top
R25  4.7k  [0603]  92.2,29.72 270 top
R26  1k  [0603]  86.74,9.4 0 top
R27  FLEX_SENSOR-4.5"  [FLEX_SENSOR]  107.44,19.05 0 top
R28  FLEX_SENSOR-4.5"  [FLEX_SENSOR]  87.12,19.05 0 top
R29  100k  [0603]  117.47,20.19 180 top
R30  100k  [0603]  128.91,20.19 0 top
R31  4.7k  [0603]  128.27,29.72 270 top
R32  4.7k  [0603]  118.11,29.72 270 top
R33  1k  [0603]  112.65,9.4 0 top
R34  FLEX_SENSOR-4.5"  [FLEX_SENSOR]  133.35,19.05 0 top
R35  FLEX_SENSOR-4.5"  [FLEX_SENSOR]  113.03,19.05 0 top
R36  100k  [0603]  143.38,20.19 180 top
R37  100k  [0603]  154.81,20.19 0 top
R38  4.7k  [0603]  154.18,29.72 270 top
R39  4.7k  [0603]  144.02,29.72 270 top
R40  1k  [0603]  138.56,9.4 0 top
R41  FLEX_SENSOR-4.5"  [FLEX_SENSOR]  159.26,19.05 0 top
R42  FLEX_SENSOR-4.5"  [FLEX_SENSOR]  138.94,19.05 0 top
R43  100k  [0603]  169.29,20.19 180 top
R44  100k  [0603]  180.72,20.19 0 top
R45  4.7k  [0603]  180.09,29.72 270 top
R46  4.7k  [0603]  169.93,29.72 270 top
R47  1k  [0603]  164.47,9.4 0 top
R48  FLEX_SENSOR-4.5"  [FLEX_SENSOR]  185.17,19.05 0 top
R49  FLEX_SENSOR-4.5"  [FLEX_SENSOR]  164.85,19.05 0 top
R50  100k  [0603]  195.2,20.19 180 top
R51  100k  [0603]  206.63,20.19 0 top
R52  4.7k  [0603]  205.99,29.72 270 top
R53  4.7k  [0603]  195.83,29.72 270 top
R54  1k  [0603]  190.37,9.4 0 top
R55  FLEX_SENSOR-4.5"  [FLEX_SENSOR]  211.07,19.05 0 top
R56  FLEX_SENSOR-4.5"  [FLEX_SENSOR]  190.75,19.05 0 top
R57  100k  [0603]  221.11,20.19 180 top
R58  100k  [0603]  232.54,20.19 0 top
R59  4.7k  [0603]  231.9,29.72 270 top
R60  4.7k  [0603]  221.74,29.72 270 top
R61  1k  [0603]  216.28,9.4 0 top
R62  FLEX_SENSOR-4.5"  [FLEX_SENSOR]  236.98,19.05 0 top
R63  FLEX_SENSOR-4.5"  [FLEX_SENSOR]  216.66,19.05 0 top
R64  100k  [0603]  13.84,55.5 180 top
R65  100k  [0603]  25.27,55.5 0 top
R66  4.7k  [0603]  24.64,65.02 270 top
R67  4.7k  [0603]  14.48,65.02 270 top
R68  1k  [0603]  9.02,44.7 0 top
R69  FLEX_SENSOR-4.5"  [FLEX_SENSOR]  29.72,54.36 0 top
R70  FLEX_SENSOR-4.5"  [FLEX_SENSOR]  9.4,54.36 0 top
R71  100k  [0603]  39.75,55.5 180 top
R72  100k  [0603]  51.18,55.5 0 top
R73  4.7k  [0603]  50.55,65.02 270 top
R74  4.7k  [0603]  40.39,65.02 270 top
R75  1k  [0603]  34.92,44.7 0 top
R76  FLEX_SENSOR-4.5"  [FLEX_SENSOR]  55.63,54.36 0 top
R77  FLEX_SENSOR-4.5"  [FLEX_SENSOR]  35.31,54.36 0 top
R78  100k  [0603]  65.66,55.5 180 top
R79  100k  [0603]  77.09,55.5 0 top
R80  4.7k  [0603]  76.45,65.02 270 top
R81  4.7k  [0603]  66.29,65.02 270 top
R82  1k  [0603]  60.83,44.7 0 top
R83  FLEX_SENSOR-4.5"  [FLEX_SENSOR]  81.53,54.36 0 top
R84  FLEX_SENSOR-4.5"  [FLEX_SENSOR]  61.21,54.36 0 top
R85  100k  [0603]  91.57,55.5 180 top
R86  100k  [0603]  103,55.5 0 top
R87  4.7k  [0603]  102.36,65.02 270 top
R88  4.7k  [0603]  92.2,65.02 270 top
R89  1k  [0603]  86.74,44.7 0 top
R90  FLEX_SENSOR-4.5"  [FLEX_SENSOR]  107.44,54.36 0 top
R91  FLEX_SENSOR-4.5"  [FLEX_SENSOR]  87.12,54.36 0 top
R92  100k  [0603]  117.47,55.5 180 top
R93  100k  [0603]  128.91,55.5 0 top
R94  4.7k  [0603]  128.27,65.02 270 top
R95  4.7k  [0603]  118.11,65.02 270 top
R96  1k  [0603]  112.65,44.7 0 top
R97  FLEX_SENSOR-4.5"  [FLEX_SENSOR]  133.35,54.36 0 top
R98  FLEX_SENSOR-4.5"  [FLEX_SENSOR]  113.03,54.36 0 top
R99  100k  [0603]  143.38,55.5 180 top
R100  100k  [0603]  154.81,55.5 0 top
R101  4.7k  [0603]  154.18,65.02 270 top
R102  4.7k  [0603]  144.02,65.02 270 top
R103  1k  [0603]  138.56,44.7 0 top
R104  FLEX_SENSOR-4.5"  [FLEX_SENSOR]  159.26,54.36 0 top
R105  FLEX_SENSOR-4.5"  [FLEX_SENSOR]  138.94,54.36 0 top
R106  100k  [0603]  169.29,55.5 180 top
R107  100k  [0603]  180.72,55.5 0 top
R108  4.7k  [0603]  180.09,65.02 270 top
R109  4.7k  [0603]  169.93,65.02 270 top
R110  1k  [0603]  164.47,44.7 0 top
R111  FLEX_SENSOR-4.5"  [FLEX_SENSOR]  185.17,54.36 0 top
R112  FLEX_SENSOR-4.5"  [FLEX_SENSOR]  164.85,54.36 0 top
R113  100k  [0603]  195.2,55.5 180 top
R114  100k  [0603]  206.63,55.5 0 top
R115  4.7k  [0603]  205.99,65.02 270 top
R116  4.7k  [0603]  195.83,65.02 270 top
R117  1k  [0603]  190.37,44.7 0 top
R118  FLEX_SENSOR-4.5"  [FLEX_SENSOR]  211.07,54.36 0 top
R119  FLEX_SENSOR-4.5"  [FLEX_SENSOR]  190.75,54.36 0 top
R120  100k  [0603]  221.11,55.5 180 top
R121  100k  [0603]  232.54,55.5 0 top
R122  4.7k  [0603]  231.9,65.02 270 top
R123  4.7k  [0603]  221.74,65.02 270 top
R124  1k  [0603]  216.28,44.7 0 top
R125  FLEX_SENSOR-4.5"  [FLEX_SENSOR]  236.98,54.36 0 top
R126  FLEX_SENSOR-4.5"  [FLEX_SENSOR]  216.66,54.36 0 top
R127  100k  [0603]  13.84,90.81 180 top
R128  100k  [0603]  25.27,90.81 0 top
R129  4.7k  [0603]  24.64,100.33 270 top
R130  4.7k  [0603]  14.48,100.33 270 top
R131  1k  [0603]  9.02,80.01 0 top
R132  FLEX_SENSOR-4.5"  [FLEX_SENSOR]  29.72,89.66 0 top
R133  FLEX_SENSOR-4.5"  [FLEX_SENSOR]  9.4,89.66 0 top
R134  100k  [0603]  39.75,90.81 180 top
R135  100k  [0603]  51.18,90.81 0 top
R136  4.7k  [0603]  50.55,100.33 270 top
R137  4.7k  [0603]  40.39,100.33 270 top
R138  1k  [0603]  34.92,80.01 0 top
R139  FLEX_SENSOR-4.5"  [FLEX_SENSOR]  55.63,89.66 0 top
R140  FLEX_SENSOR-4.5"  [FLEX_SENSOR]  35.31,89.66 0 top
R141  100k  [0603]  65.66,90.81 180 top
R142  100k  [0603]  77.09,90.81 0 top
R143  4.7k  [0603]  76.45,100.33 270 top
R144  4.7k  [0603]  66.29,100.33 270 top
R145  1k  [0603]  60.83,80.01 0 top
R146  FLEX_SENSOR-4.5"  [FLEX_SENSOR]  81.53,89.66 0 top
R147  FLEX_SENSOR-4.5"  [FLEX_SENSOR]  61.21,89.66 0 top
R148  100k  [0603]  91.57,90.81 180 top
R149  100k  [0603]  103,90.81 0 top
R150  4.7k  [0603]  102.36,100.33 270 top
R151  4.7k  [0603]  92.2,100.33 270 top
R152  1k  [0603]  86.74,80.01 0 top
R153  FLEX_SENSOR-4.5"  [FLEX_SENSOR]  107.44,89.66 0 top
R154  FLEX_SENSOR-4.5"  [FLEX_SENSOR]  87.12,89.66 0 top
R155  100k  [0603]  117.47,90.81 180 top
R156  100k  [0603]  128.91,90.81 0 top
R157  4.7k  [0603]  128.27,100.33 270 top
R158  4.7k  [0603]  118.11,100.33 270 top
R159  1k  [0603]  112.65,80.01 0 top
R160  FLEX_SENSOR-4.5"  [FLEX_SENSOR]  133.35,89.66 0 top
R161  FLEX_SENSOR-4.5"  [FLEX_SENSOR]  113.03,89.66 0 top
R162  100k  [0603]  143.38,90.81 180 top
R163  100k  [0603]  154.81,90.81 0 top
R164  4.7k  [0603]  154.18,100.33 270 top
R165  4.7k  [0603]  144.02,100.33 270 top
R166  1k  [0603]  138.56,80.01 0 top
R167  FLEX_SENSOR-4.5"  [FLEX_SENSOR]  159.26,89.66 0 top
R168  FLEX_SENSOR-4.5"  [FLEX_SENSOR]  138.94,89.66 0 top
R169  100k  [0603]  169.29,90.81 180 top
R170  100k  [0603]  180.72,90.81 0 top
R171  4.7k  [0603]  180.09,100.33 270 top
R172  4.7k  [0603]  169.93,100.33 270 top
R173  1k  [0603]  164.47,80.01 0 top
R174  FLEX_SENSOR-4.5"  [FLEX_SENSOR]  185.17,89.66 0 top
R175  FLEX_SENSOR-4.5"  [FLEX_SENSOR]  164.85,89.66 0 top
R176  100k  [0603]  195.2,90.81 180 top
R177  100k  [0603]  206.63,90.81 0 top
R178  4.7k  [0603]  205.99,100.33 270 top
R179  4.7k  [0603]  195.83,100.33 270 top
R180  1k  [0603]  190.37,80.01 0 top
R181  FLEX_SENSOR-4.5"  [FLEX_SENSOR]  211.07,89.66 0 top
R182  FLEX_SENSOR-4.5"  [FLEX_SENSOR]  190.75,89.66 0 top
R183  100k  [0603]  221.11,90.81 180 top
R184  100k  [0603]  232.54,90.81 0 top
R185  4.7k  [0603]  231.9,100.33 270 top
R186  4.7k  [0603]  221.74,100.33 270 top
R187  1k  [0603]  216.28,80.01 0 top
R188  FLEX_SENSOR-4.5"  [FLEX_SENSOR]  236.98,89.66 0 top
R189  FLEX_SENSOR-4.5"  [FLEX_SENSOR]  216.66,89.66 0 top
TP1  TEST-POINT3  [PAD.03X.03]  17.02,17.02 0 bottom
TP2  TEST-POINT3  [PAD.03X.03]  14.48,17.02 0 bottom
TP3  TEST-POINT3  [PAD.03X.03]  42.93,17.02 0 bottom
TP4  TEST-POINT3  [PAD.03X.03]  40.39,17.02 0 bottom
TP5  TEST-POINT3  [PAD.03X.03]  68.83,17.02 0 bottom
TP6  TEST-POINT3  [PAD.03X.03]  66.29,17.02 0 bottom
TP7  TEST-POINT3  [PAD.03X.03]  94.74,17.02 0 bottom
TP8  TEST-POINT3  [PAD.03X.03]  92.2,17.02 0 bottom
TP9  TEST-POINT3  [PAD.03X.03]  120.65,17.02 0 bottom
TP10  TEST-POINT3  [PAD.03X.03]  118.11,17.02 0 bottom
TP11  TEST-POINT3  [PAD.03X.03]  146.56,17.02 0 bottom
TP12  TEST-POINT3  [PAD.03X.03]  144.02,17.02 0 bottom
TP13  TEST-POINT3  [PAD.03X.03]  172.47,17.02 0 bottom
TP14  TEST-POINT3  [PAD.03X.03]  169.93,17.02 0 bottom
TP15  TEST-POINT3  [PAD.03X.03]  198.37,17.02 0 bottom
TP16  TEST-POINT3  [PAD.03X.03]  195.83,17.02 0 bottom
TP17  TEST-POINT3  [PAD.03X.03]  224.28,17.02 0 bottom
TP18  TEST-POINT3  [PAD.03X.03]  221.74,17.02 0 bottom
TP19  TEST-POINT3  [PAD.03X.03]  17.02,52.32 0 bottom
TP20  TEST-POINT3  [PAD.03X.03]  14.48,52.32 0 bottom
TP21  TEST-POINT3  [PAD.03X.03]  42.93,52.32 0 bottom
TP22  TEST-POINT3  [PAD.03X.03]  40.39,52.32 0 bottom
TP23  TEST-POINT3  [PAD.03X.03]  68.83,52.32 0 bottom
TP24  TEST-POINT3  [PAD.03X.03]  66.29,52.32 0 bottom
TP25  TEST-POINT3  [PAD.03X.03]  94.74,52.32 0 bottom
TP26  TEST-POINT3  [PAD.03X.03]  92.2,52.32 0 bottom
TP27  TEST-POINT3  [PAD.03X.03]  120.65,52.32 0 bottom
TP28  TEST-POINT3  [PAD.03X.03]  118.11,52.32 0 bottom
TP29  TEST-POINT3  [PAD.03X.03]  146.56,52.32 0 bottom
TP30  TEST-POINT3  [PAD.03X.03]  144.02,52.32 0 bottom
TP31  TEST-POINT3  [PAD.03X.03]  172.47,52.32 0 bottom
TP32  TEST-POINT3  [PAD.03X.03]  169.93,52.32 0 bottom
TP33  TEST-POINT3  [PAD.03X.03]  198.37,52.32 0 bottom
TP34  TEST-POINT3  [PAD.03X.03]  195.83,52.32 0 bottom
TP35  TEST-POINT3  [PAD.03X.03]  224.28,52.32 0 bottom
TP36  TEST-POINT3  [PAD.03X.03]  221.74,52.32 0 bottom
TP37  TEST-POINT3  [PAD.03X.03]  17.02,87.63 0 bottom
TP38  TEST-POINT3  [PAD.03X.03]  14.48,87.63 0 bottom
TP39  TEST-POINT3  [PAD.03X.03]  42.93,87.63 0 bottom
TP40  TEST-POINT3  [PAD.03X.03]  40.39,87.63 0 bottom
TP41  TEST-POINT3  [PAD.03X.03]  68.83,87.63 0 bottom
TP42  TEST-POINT3  [PAD.03X.03]  66.29,87.63 0 bottom
TP43  TEST-POINT3  [PAD.03X.03]  94.74,87.63 0 bottom
TP44  TEST-POINT3  [PAD.03X.03]  92.2,87.63 0 bottom
TP45  TEST-POINT3  [PAD.03X.03]  120.65,87.63 0 bottom
TP46  TEST-POINT3  [PAD.03X.03]  118.11,87.63 0 bottom
TP47  TEST-POINT3  [PAD.03X.03]  146.56,87.63 0 bottom
TP48  TEST-POINT3  [PAD.03X.03]  144.02,87.63 0 bottom
TP49  TEST-POINT3  [PAD.03X.03]  172.47,87.63 0 bottom
TP50  TEST-POINT3  [PAD.03X.03]  169.93,87.63 0 bottom
TP51  TEST-POINT3  [PAD.03X.03]  198.37,87.63 0 bottom
TP52  TEST-POINT3  [PAD.03X.03]  195.83,87.63 0 bottom
TP53  TEST-POINT3  [PAD.03X.03]  224.28,87.63 0 bottom
TP54  TEST-POINT3  [PAD.03X.03]  221.74,87.63 0 bottom
U1  ADS1015  [MSOP10]  24,15.75 270 top
U2  LMV358  [SO08]  41.66,16.38 90 top
U3  ADS1015  [MSOP10]  49.91,15.75 270 top
U4  LMV358  [SO08]  15.75,16.38 90 top
U5  LMV358  [SO08]  67.56,16.38 90 top
U6  ADS1015  [MSOP10]  75.82,15.75 270 top
U7  LMV358  [SO08]  93.47,16.38 90 top
U8  ADS1015  [MSOP10]  101.73,15.75 270 top
U9  LMV358  [SO08]  119.38,16.38 90 top
U10  ADS1015  [MSOP10]  127.64,15.75 270 top
U11  LMV358  [SO08]  145.29,16.38 90 top
U12  ADS1015  [MSOP10]  153.54,15.75 270 top
U13  LMV358  [SO08]  171.2,16.38 90 top
U14  ADS1015  [MSOP10]  179.45,15.75 270 top
U15  LMV358  [SO08]  197.1,16.38 90 top
U16  ADS1015  [MSOP10]  205.36,15.75 270 top
U17  LMV358  [SO08]  223.01,16.38 90 top
U18  ADS1015  [MSOP10]  231.27,15.75 270 top
U19  LMV358  [SO08]  15.75,51.69 90 top
U20  ADS1015  [MSOP10]  24,51.05 270 top
U21  LMV358  [SO08]  41.66,51.69 90 top
U22  ADS1015  [MSOP10]  49.91,51.05 270 top
U23  LMV358  [SO08]  67.56,51.69 90 top
U24  ADS1015  [MSOP10]  75.82,51.05 270 top
U25  LMV358  [SO08]  93.47,51.69 90 top
U26  ADS1015  [MSOP10]  101.73,51.05 270 top
U27  LMV358  [SO08]  119.38,51.69 90 top
U28  ADS1015  [MSOP10]  127.64,51.05 270 top
U29  LMV358  [SO08]  145.29,51.69 90 top
U30  ADS1015  [MSOP10]  153.54,51.05 270 top
U31  LMV358  [SO08]  171.2,51.69 90 top
U32  ADS1015  [MSOP10]  179.45,51.05 270 top
U33  LMV358  [SO08]  197.1,51.69 90 top
U34  ADS1015  [MSOP10]  205.36,51.05 270 top
U35  LMV358  [SO08]  223.01,51.69 90 top
U36  ADS1015  [MSOP10]  231.27,51.05 270 top
U37  LMV358  [SO08]  15.75,87 90 top
U38  ADS1015  [MSOP10]  24,86.36 270 top
U39  LMV358  [SO08]  41.66,87 90 top
U40  ADS1015  [MSOP10]  49.91,86.36 270 top
U41  LMV358  [SO08]  67.56,87 90 top
U42  ADS1015  [MSOP10]  75.82,86.36 270 top
U43  LMV358  [SO08]  93.47,87 90 top
U44  ADS1015  [MSOP10]  101.73,86.36 270 top
U45  LMV358  [SO08]  119.38,87 90 top
U46  ADS1015  [MSOP10]  127.64,86.36 270 top
U47  LMV358  [SO08]  145.29,87 90 top
U48  ADS1015  [MSOP10]  153.54,86.36 270 top
U49  LMV358  [SO08]  171.2,87 90 top
U50  ADS1015  [MSOP10]  179.45,86.36 270 top
U51  LMV358  [SO08]  197.1,87 90 top
U52  ADS1015  [MSOP10]  205.36,86.36 270 top
U53  LMV358  [SO08]  223.01,87 90 top
U54  ADS1015  [MSOP10]  231.27,86.36 270 top
U$1  [GND]  11.94,8.89 90 top
U$2  [GND]  11.94,8.89 90 bottom
U$3  [3V3-TEXT]  31.11,25.27 90 bottom
U$4  [GND-TEXT-03]  31.11,27.81 90 bottom
U$5  [3.3V]  14.48,8.89 90 top
U$6  [3.3V]  14.48,8.89 90 bottom
U$7  [SDA]  24.64,8.89 90 top
U$8  [SDA]  24.64,8.89 90 bottom
U$9  [SCL]  27.18,8.89 90 top
U$10  [SCL]  27.18,8.89 90 bottom
U$11  [(PWR)]  7.11,14.22 0 top
U$12  [SDA0]  27.05,27.81 90 bottom
U$13  [SCL2]  27.05,25.15 90 bottom
U$14  [QWIIC_FLEX_GLOVE0]  31.24,20.83 0 bottom
U$15  [I2C-()]  21.97,18.16 90 top
U$16  [FINGER_10]  14.73,37.85 0 bottom
U$17  [FINGER_21]  31.5,37.85 0 bottom
U$18  [GND]  37.85,8.89 90 top
U$19  [GND]  37.85,8.89 90 bottom
U$20  [3.3V]  40.39,8.89 90 top
U$21  [3.3V]  40.39,8.89 90 bottom
U$22  [SDA]  50.55,8.89 90 top
U$23  [SDA]  50.55,8.89 90 bottom
U$24  [SCL]  53.09,8.89 90 top
U$25  [SCL]  53.09,8.89 90 bottom
U$26  [(PWR)]  33.02,14.22 0 top
U$27  [3V3-TEXT]  57.02,25.27 90 bottom
U$28  [GND-TEXT-03]  57.02,27.81 90 bottom
U$29  [SDA0]  52.96,27.81 90 bottom
U$30  [SCL2]  52.96,25.15 90 bottom
U$31  [I2C-()]  47.88,18.16 90 top
U$32  [QWIIC_FLEX_GLOVE0]  57.15,20.83 0 bottom
U$33  [FINGER_10]  40.64,37.85 0 bottom
U$34  [FINGER_21]  57.4,37.85 0 bottom
U$35  [GND]  63.75,8.89 90 top
U$36  [GND]  63.75,8.89 90 bottom
U$37  [3.3V]  66.29,8.89 90 top
U$38  [3.3V]  66.29,8.89 90 bottom
U$39  [SDA]  76.45,8.89 90 top
U$40  [SDA]  76.45,8.89 90 bottom
U$41  [SCL]  78.99,8.89 90 top
U$42  [SCL]  78.99,8.89 90 bottom
U$43  [(PWR)]  58.93,14.22 0 top
U$44  [3V3-TEXT]  82.93,25.27 90 bottom
U$45  [GND-TEXT-03]  82.93,27.81 90 bottom
U$46  [SDA0]  78.87,27.81 90 bottom
U$47  [SCL2]  78.87,25.15 90 bottom
U$48  [I2C-()]  73.79,18.16 90 top
U$49  [QWIIC_FLEX_GLOVE0]  83.06,20.83 0 bottom
U$50  [FINGER_10]  66.55,37.85 0 bottom
U$51  [FINGER_21]  83.31,37.85 0 bottom
U$52  [GND]  89.66,8.89 90 top
U$53  [GND]  89.66,8.89 90 bottom
U$54  [3.3V]  92.2,8.89 90 top
U$55  [3.3V]  92.2,8.89 90 bottom
U$56  [SDA]  102.36,8.89 90 top
U$57  [SDA]  102.36,8.89 90 bottom
U$58  [SCL]  104.9,8.89 90 top
U$59  [SCL]  104.9,8.89 90 bottom
U$60  [(PWR)]  84.84,14.22 0 top
U$61  [3V3-TEXT]  108.84,25.27 90 bottom
U$62  [GND-TEXT-03]  108.84,27.81 90 bottom
U$63  [SDA0]  104.78,27.81 90 bottom
U$64  [SCL2]  104.78,25.15 90 bottom
U$65  [I2C-()]  99.69,18.16 90 top
U$66  [QWIIC_FLEX_GLOVE0]  108.97,20.83 0 bottom
U$67  [FINGER_10]  92.46,37.85 0 bottom
U$68  [FINGER_21]  109.22,37.85 0 bottom
U$69  [GND]  115.57,8.89 90 top
U$70  [GND]  115.57,8.89 90 bottom
U$71  [3.3V]  118.11,8.89 90 top
U$72  [3.3V]  118.11,8.89 90 bottom
U$73  [SDA]  128.27,8.89 90 top
U$74  [SDA]  128.27,8.89 90 bottom
U$75  [SCL]  130.81,8.89 90 top
U$76  [SCL]  130.81,8.89 90 bottom
U$77  [(PWR)]  110.74,14.22 0 top
U$78  [3V3-TEXT]  134.75,25.27 90 bottom
U$79  [GND-TEXT-03]  134.75,27.81 90 bottom
U$80  [SDA0]  130.68,27.81 90 bottom
U$81  [SCL2]  130.68,25.15 90 bottom
U$82  [I2C-()]  125.6,18.16 90 top
U$83  [QWIIC_FLEX_GLOVE0]  134.87,20.83 0 bottom
U$84  [FINGER_10]  118.36,37.85 0 bottom
U$85  [FINGER_21]  135.13,37.85 0 bottom
U$86  [GND]  141.48,8.89 90 top
U$87  [GND]  141.48,8.89 90 bottom
U$88  [3.3V]  144.02,8.89 90 top
U$89  [3.3V]  144.02,8.89 90 bottom
U$90  [SDA]  154.18,8.89 90 top
U$91  [SDA]  154.18,8.89 90 bottom
U$92  [SCL]  156.72,8.89 90 top
U$93  [SCL]  156.72,8.89 90 bottom
U$94  [(PWR)]  136.65,14.22 0 top
U$95  [3V3-TEXT]  160.66,25.27 90 bottom
U$96  [GND-TEXT-03]  160.66,27.81 90 bottom
U$97  [SDA0]  156.59,27.81 90 bottom
U$98  [SCL2]  156.59,25.15 90 bottom
U$99  [I2C-()]  151.51,18.16 90 top
U$100  [QWIIC_FLEX_GLOVE0]  160.78,20.83 0 bottom
U$101  [FINGER_10]  144.27,37.85 0 bottom
U$102  [FINGER_21]  161.04,37.85 0 bottom
U$103  [GND]  167.39,8.89 90 top
U$104  [GND]  167.39,8.89 90 bottom
U$105  [3.3V]  169.93,8.89 90 top
U$106  [3.3V]  169.93,8.89 90 bottom
U$107  [SDA]  180.09,8.89 90 top
U$108  [SDA]  180.09,8.89 90 bottom
U$109  [SCL]  182.63,8.89 90 top
U$110  [SCL]  182.63,8.89 90 bottom
U$111  [(PWR)]  162.56,14.22 0 top
U$112  [3V3-TEXT]  186.56,25.27 90 bottom
U$113  [GND-TEXT-03]  186.56,27.81 90 bottom
U$114  [SDA0]  182.5,27.81 90 bottom
U$115  [SCL2]  182.5,25.15 90 bottom
U$116  [I2C-()]  177.42,18.16 90 top
U$117  [QWIIC_FLEX_GLOVE0]  186.69,20.83 0 bottom
U$118  [FINGER_10]  170.18,37.85 0 bottom
U$119  [FINGER_21]  186.94,37.85 0 bottom
U$120  [GND]  193.29,8.89 90 top
U$121  [GND]  193.29,8.89 90 bottom
U$122  [3.3V]  195.83,8.89 90 top
U$123  [3.3V]  195.83,8.89 90 bottom
U$124  [SDA]  205.99,8.89 90 top
U$125  [SDA]  205.99,8.89 90 bottom
U$126  [SCL]  208.53,8.89 90 top
U$127  [SCL]  208.53,8.89 90 bottom
U$128  [(PWR)]  188.47,14.22 0 top
U$129  [3V3-TEXT]  212.47,25.27 90 bottom
U$130  [GND-TEXT-03]  212.47,27.81 90 bottom
U$131  [SDA0]  208.41,27.81 90 bottom
U$132  [SCL2]  208.41,25.15 90 bottom
U$133  [I2C-()]  203.33,18.16 90 top
U$134  [QWIIC_FLEX_GLOVE0]  212.6,20.83 0 bottom
U$135  [FINGER_10]  196.09,37.85 0 bottom
U$136  [FINGER_21]  212.85,37.85 0 bottom
U$137  [GND]  219.2,8.89 90 top
U$138  [GND]  219.2,8.89 90 bottom
U$139  [3.3V]  221.74,8.89 90 top
U$140  [3.3V]  221.74,8.89 90 bottom
U$141  [SDA]  231.9,8.89 90 top
U$142  [SDA]  231.9,8.89 90 bottom
U$143  [SCL]  234.44,8.89 90 top
U$144  [SCL]  234.44,8.89 90 bottom
U$145  [(PWR)]  214.38,14.22 0 top
U$146  [3V3-TEXT]  238.38,25.27 90 bottom
U$147  [GND-TEXT-03]  238.38,27.81 90 bottom
U$148  [SDA0]  234.31,27.81 90 bottom
U$149  [SCL2]  234.31,25.15 90 bottom
U$150  [I2C-()]  229.24,18.16 90 top
U$151  [QWIIC_FLEX_GLOVE0]  238.51,20.83 0 bottom
U$152  [FINGER_10]  222,37.85 0 bottom
U$153  [FINGER_21]  238.76,37.85 0 bottom
U$154  [GND]  11.94,44.2 90 top
U$155  [GND]  11.94,44.2 90 bottom
U$156  [3.3V]  14.48,44.2 90 top
U$157  [3.3V]  14.48,44.2 90 bottom
U$158  [SDA]  24.64,44.2 90 top
U$159  [SDA]  24.64,44.2 90 bottom
U$160  [SCL]  27.18,44.2 90 top
U$161  [SCL]  27.18,44.2 90 bottom
U$162  [(PWR)]  7.11,49.53 0 top
U$163  [3V3-TEXT]  31.11,60.58 90 bottom
U$164  [GND-TEXT-03]  31.11,63.12 90 bottom
U$165  [SDA0]  27.05,63.12 90 bottom
U$166  [SCL2]  27.05,60.45 90 bottom
U$167  [I2C-()]  21.97,53.47 90 top
U$168  [QWIIC_FLEX_GLOVE0]  31.24,56.13 0 bottom
U$169  [FINGER_10]  14.73,73.15 0 bottom
U$170  [FINGER_21]  31.5,73.15 0 bottom
U$171  [GND]  37.85,44.2 90 top
U$172  [GND]  37.85,44.2 90 bottom
U$173  [3.3V]  40.39,44.2 90 top
U$174  [3.3V]  40.39,44.2 90 bottom
U$175  [SDA]  50.55,44.2 90 top